# Altium PCB TRACK_POGOPIN.PcbDoc
Units mm, origin at the board's own origin, x right, y up, seen from the top; angles counter-clockwise.
Board outline 104.25 x 40.25 mm, 2 copper layers (Top Layer, Bottom Layer); 2 components, 0 nets, 32 pads, 6 vias.
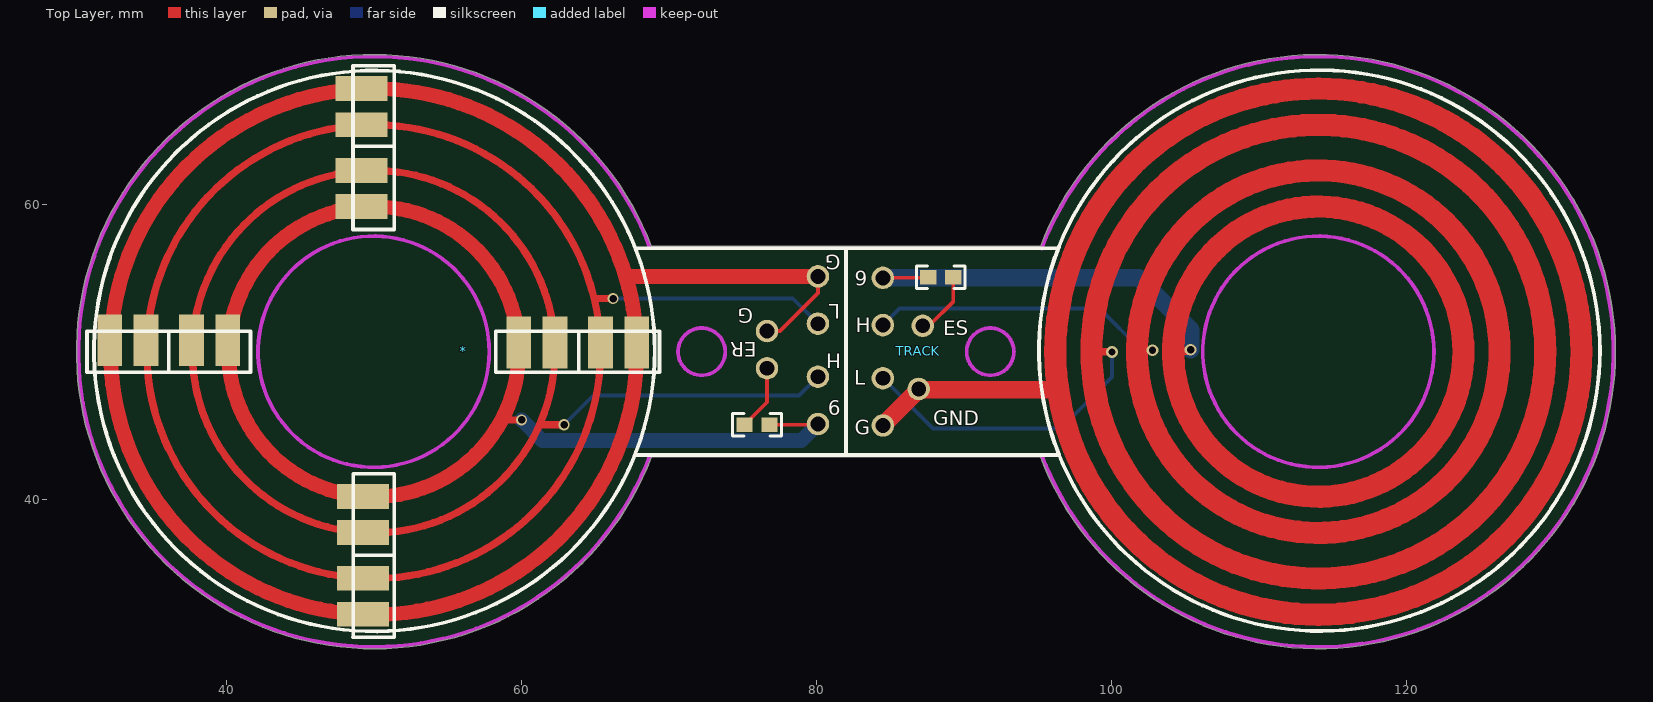
[diagram p0: Top Layer view]
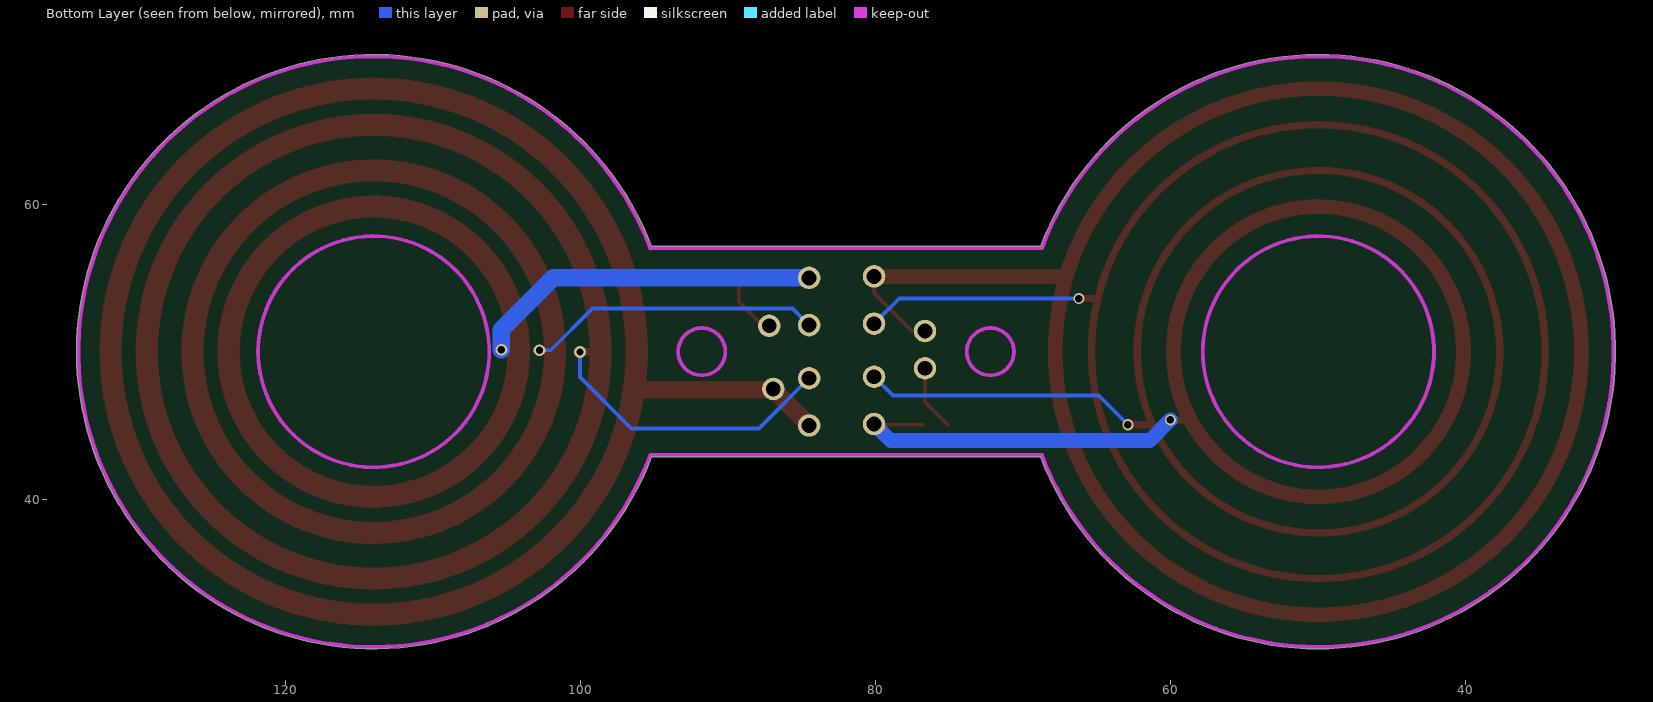
[diagram p1: Bottom Layer view, seen from below]

## Layer stack, top to bottom
Top Solder: solder mask 0.0102, Solder Resist, Dk 3.5
Top Layer: signal copper 0.0356
Dielectric 1: dielectric 0.32, FR-4, Dk 4.8
Bottom Layer: signal copper 0.0356
Bottom Solder: solder mask 0.0102, Solder Resist, Dk 3.5

## Board outline
68.823,42.873 cw(c50,50) 68.823,57.127 95.177,57.127 cw(c114,50) 134.127,50 cw(c114,50) 95.177,42.873

## Design rules (kind name [scope] priority, off if disabled: settings)
Clearance [All] p1: gap=0.254
PolygonConnect [All] p1: connectstyle=Relief reliefconductorwidth=0.254 reliefentries=4 polygonreliefangle="90 Angle" airgapwidth=0.254
RoutingVias [All] p1: holewidth=0.711 width=1.27 viastyle="Through Hole" minholewidth=0.711 minwidth=1.27 maxholewidth=0.711 maxwidth=1.27
SolderMaskExpansion [All] p1: expansion=0.102
Width [All] p1: maxlimit=0.254 minlimit=0.254 preferedwidth=0.254
30 further rules are at their usual default settings.

## Components (designator, comment, footprint, x,y, rotation, side; value= is the part's Value field where it differs from the comment)
* "POGOPIN" "POGPPIN_FIANL - duplicate" 50,50 r180 top
TRACK "TRACK" "TRACK4 - FINAL - duplicate" 114,50 r0 top

## Footprints (in the part's own frame and the unit in brackets; to place one, negate y for a bottom-side part, rotate by r counter-clockwise, add the part's x,y. Pads: shape width x height; smd on the part's side, far side on the other; paste and mask are expansions set on the pad)
"POGPPIN_FIANL - duplicate" [mm]
  rect 1.1x1 smd: 1(-26.825,4.95) 2(-25.125,4.95)
  rect 3.5x1.68 smd: 8(0.725,15.345) 9(0.725,17.795) 10(0.725,9.805) 11(0.725,12.255) 16(0.825,-15.37) 17(0.825,-17.82) 18(0.825,-12.28) 19(0.825,-9.83)
  round 1.524 hole 1: 9V(-30.1,4.9) CANH(-30.1,1.7) CANL(-30.1,-1.9) ER(-26.65,1.125) GND(-30.1,-5.1) GND(-26.65,-1.4)
  rect 1.68x3.5 smd: 12(-17.82,-0.625) 13(-15.37,-0.625) 14(-12.28,-0.625) 15(-9.83,-0.625) 20(15.42,-0.775) 21(17.87,-0.775) 22(12.33,-0.775) 23(9.88,-0.775)
  Top Layer circle w1: c0,0 r17.82
  Top Layer circle w0.5: c0,0 r15.37
  Top Layer circle w1: c0,0 r9.83
  Top Layer circle w0.5: c0,0 r12.28
  Top Layer lines w0.254: -25.125,4.95 -26.65,3.425 -26.65,1.125 ; -26.65,-1.65 -26.65,-1.4 -27.525,-1.4 -30.1,-3.975 -30.1,-5.1 ; -26.825,4.95 -30.05,4.95 -30.1,4.9
  Top Layer lines w0.5: -8.65,4.625 -10.025,4.625 ; -11.35,4.95 -12.9,4.95 ; -14.975,-3.6 -16.225,-3.6
  Top Layer lines w1: -17.5,-5.1 -30.1,-5.1
  Bottom Layer lines w0.254: -12.9,4.95 -14.875,2.975 -28.825,2.975 -30.1,1.7 ; -16.3,-3.6 -16.225,-3.6 -28.4,-3.6 ; -26.65,-1.4 -26.65,-1.45 ; -30.1,-1.9 -28.4,-3.6 ; -28.4,-3.6 -28.4,-3.6
  Bottom Layer lines w1: -10.025,4.625 -11.425,6.025 -28.975,6.025 -30.1,4.9
  Keep-Out Layer circle w0.254: c0,0 r7.83
  Keep-Out Layer circle w0.254: c-22.225,0 r1.6
  silkscreen extent -32,-19.37 19.42,19.34, body extent -26.3,4.5 -24.7,5.3, height 0.5
"TRACK4 - FINAL - duplicate" [mm]
  rect 1.1x1 smd: 1(-26.425,5.05) 2(-24.725,5.05)
  round 1.524 hole 1: 9V(-29.5,5) CANH(-29.5,1.8) CANL(-29.5,-1.8) ES(-26.8,1.75) GND(-29.5,-5) GND(-27.075,-2.525)
  Top Layer circle w1.5: c0,0 r12.28
  Top Layer circle w1.5: c0,0 r9.83
  Top Layer circle w1.5: c0,0 r17.82
  Top Layer circle w1.5: c0,0 r15.37
  Top Layer lines w0.254: -29.5,5 -26.475,5 ; -27.075,-2.525 -26.875,-2.6 ; -24.725,5.05 -24.725,3.4 -26.375,1.75 ; -11.825,0.1 -11.237,0.1 ; -26.375,1.75 -26.8,1.75 -26.375,1.75
  Top Layer lines w0.5: -14.775,0 -13.975,0 ; -9.4,0.025 -8.875,0.025
  Top Layer lines w1.2: -29.5,-5 -26.988,-2.488 -26.875,-2.6 ; -26.6,-2.575 -18.175,-2.575
  Bottom Layer lines w0.254: -29.5,-1.8 -26.1,-5.2 -17.45,-5.2 -13.975,-1.725 -13.975,-0.025 ; -29.5,1.8 -28.375,2.925 -14.825,2.925 -12,0.1 -11.237,0.1
  Bottom Layer lines w1.2: -29.5,5 -12.175,5 -8.65,1.475 -8.65,0.125
  Keep-Out Layer circle w0.254: c-22.225,0 r1.6
  Keep-Out Layer circle w0.254: c0,0 r7.83
  silkscreen extent -32,-18.92 19.08,19.07, body extent -25.9,4.6 -24.3,5.4, height 0.5

## Via types
v1: diameter 0.762, hole 0.508, Top Layer to Bottom Layer, 3 vias
v2: diameter 0.8, hole 0.5, Top Layer to Bottom Layer, 3 vias

## Nets (pads, with @x,y where several pads share a name; then routed paths per layer and width w, separated by ;. In a path a pad name is that pad's centre, name@x,y a point inside that pad or via, vN(x,y) a via of type N, cw(c..) or ccw(c..) an arc to the next point about the centre after c; other vN are vias at no path point)
pads on no net: *.1 *.2 *.8 *.9 *.9V *.10 *.11 *.12 *.13 *.14 *.15 *.16 *.17 *.18 *.19 *.20 *.21 *.22 *.23 *.CANH *.CANL *.ER *.GND TRACK.1 TRACK.2 TRACK.9V TRACK.CANH TRACK.CANL TRACK.ES TRACK.GND
copper on no net:
  other v1: 62.9,45.05 60.025,45.375 66.225,53.6
  other v2: 100.025,49.975 102.763,50.1 105.35,50.125

## Keep-outs
Keep-Out Layer:
  lines w0.254: 68.716,42.949 cw(c50,50) 68.724,57.029 68.753,57 95.25,57 ; 68.716,43 95.25,43 ; 95.263,43.005 ccw(c114,50) 95.263,56.995

## Silkscreen, mask and mechanical layers (free items; w line width, h text height)
Top Overlay:
  lines w0.254: 82,43 82,57

## Text inside footprints (layer, text, board x,y; h text height)
*: Top Overlay "G" at 75.725,52.95 h1 r180; Top Overlay "ER" at 75.95,50.625 h1 r180; Top Overlay "G" at 81.65,56.55 h1 r180; Top Overlay "L" at 81.625,53.2 h1 r180; Top Overlay "H" at 81.675,49.875 h1 r180; Top Overlay "9" at 81.65,46.7 h1 r180
TRACK: Top Overlay "G" at 82.6,44.375 h1; Top Overlay "L" at 82.575,47.775 h1; Top Overlay "H" at 82.675,51.325 h1; Top Overlay "9" at 82.6,54.475 h1; Top Overlay "ES" at 88.6,51.125 h1; Top Overlay "GND" at 87.9,45.025 h1